# EAGLE board power (EAGLE 6.5.0)
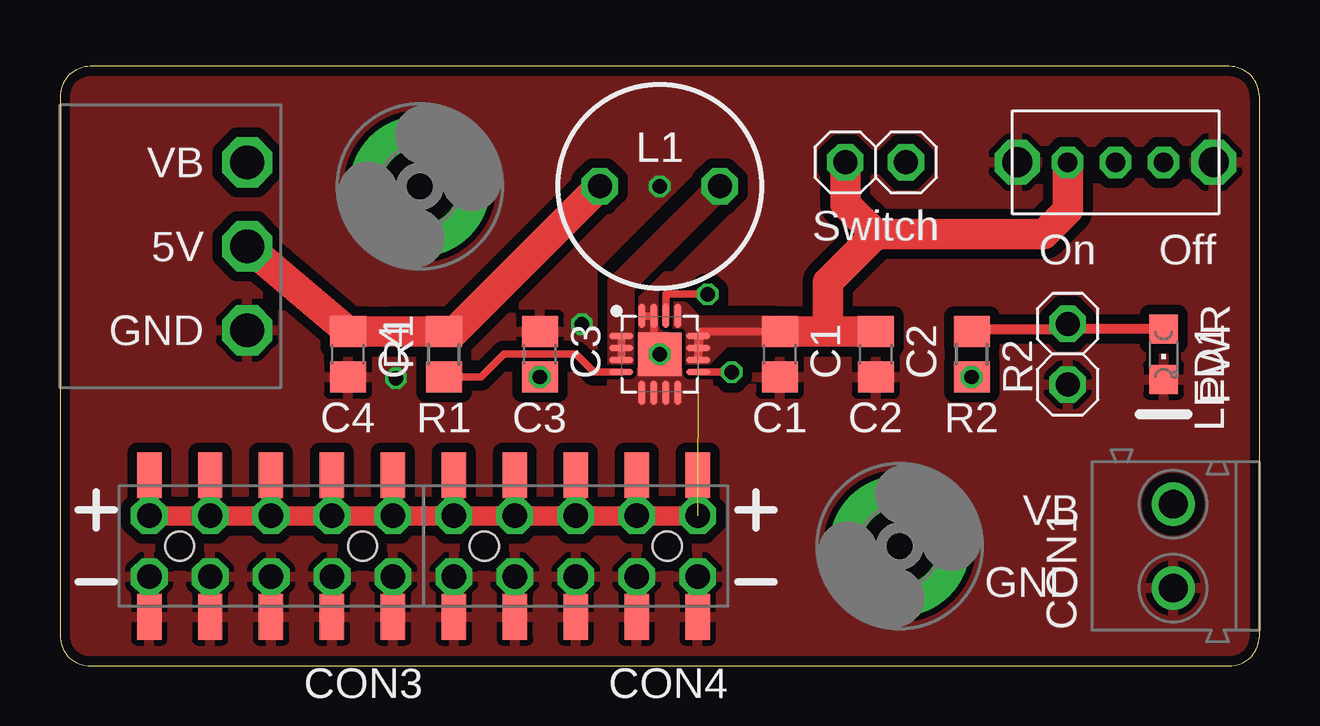
[diagram p0: board, top side]
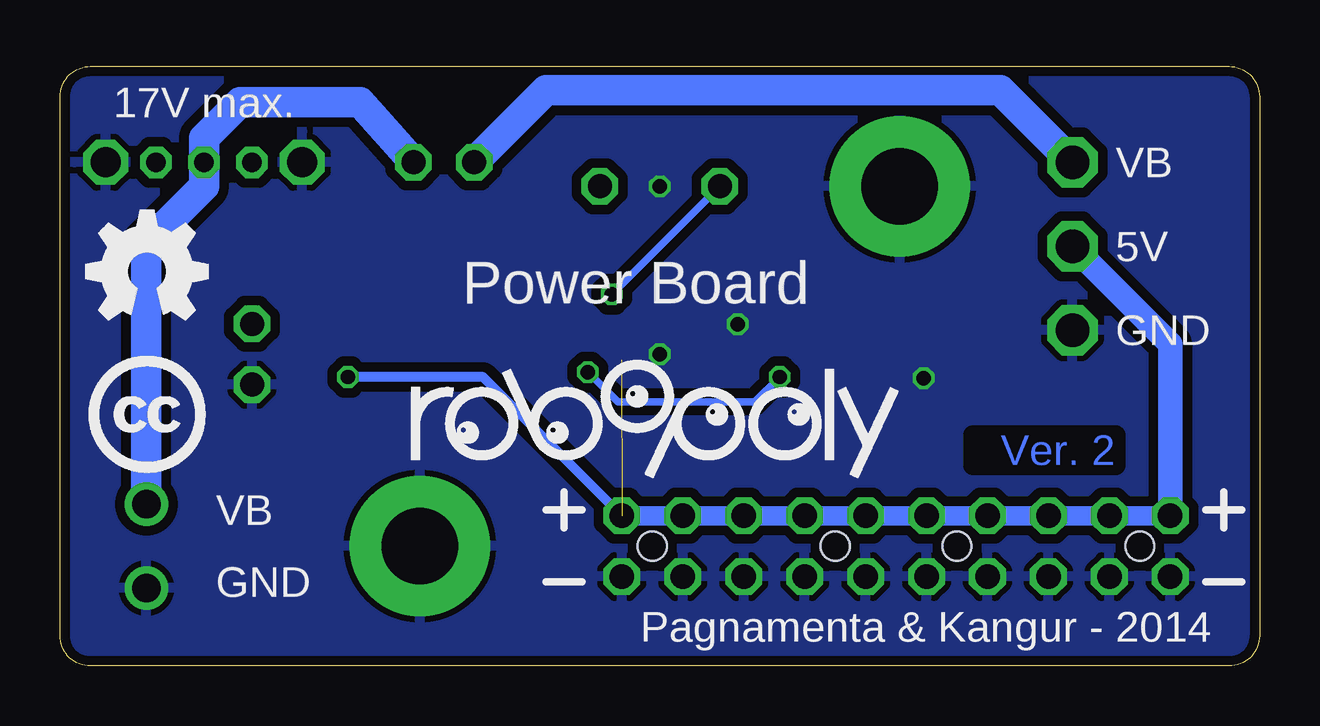
[diagram p1: board, bottom side, seen from below]

Size 50 x 25 mm. Coordinates in mm from the lower left corner, seen from the top.
Outline: 0,23.73 0,1.27 arc90 1.27,0 48.73,0 arc90 50,1.27 50,23.73 arc90 48.73,25 1.27,25 arc90 0,23.73
Copper layers (1*16): Top 0.035mm / dielectric 1.5mm / Bottom 0.035mm
Design rules "SeeedStudio_rule_no_angle_090911": minimum track width 6mil, minimum drill 12mil, track to track 6mil, track to pad 6mil, pad to pad 6mil, via to via 6mil, smd to smd 0mil, copper to edge 10mil, drill to drill 10mil, minimum pad ring 10mil, minimum via ring 6mil, stop-mask expansion 2mil, vias tented up to drill 100mil, thermal gap 10mil

## Footprints (pad centres in the part's own frame; a part is rotated, then mirrored left to right if it is on the bottom)
C0805 = smd 1.3 x 1.5: 1 -0.95,0; 2 0.95,0
4UCON-19963 = drill 1.2: 1 -1.75,3.6; 2 1.75,3.6
4UCON-19836 = drill 1.4 octagon: 1 -3.5,7.8; 2 0,7.8; 3 3.5,7.8
4UCON-10709 = smd 1.02 x 1.9: 1 -5.08,-2.95; 2 -2.54,-2.95; 3 0,-2.95; 4 2.54,-2.95; 5 5.08,-2.95; 6 5.08,2.95; 7 2.54,2.95; 8 0,2.95; 9 -2.54,2.95; 10 -5.08,2.95 | drill 1.02 octagon: 11 -5.08,-1.27; 12 -2.54,-1.27; 13 0,-1.27; 14 2.54,-1.27; 15 5.08,-1.27; 16 5.08,1.27; 17 2.54,1.27; 18 0,1.27; 19 -2.54,1.27; 20 -5.08,1.27 | hole 1.2: -3.81,0; 3.81,0
3,2-PAD = drill 3.2 pad 5.842: B3,2 0,0
QFN16 = smd 1 x 0.28: 1 -1.6,0.75; 2 -1.6,0.25; 3 -1.6,-0.25; 4 -1.6,-0.75; 9 1.6,-0.75; 10 1.6,-0.25; 11 1.6,0.25; 12 1.6,0.75 | smd 0.28 x 1: 5 -0.75,-1.6; 6 -0.25,-1.6; 7 0.25,-1.6; 8 0.75,-1.6; 13 0.75,1.6; 14 0.25,1.6; 15 -0.25,1.6; 16 -0.75,1.6 | smd 1.8 x 1.8: PAD 0,0
EXT = drill 1 octagon: 1 -1.27,0; 2 1.27,0
09D = drill 1 octagon: 1 -2.5,0; 2 2.5,0
CHIPLED_0805 = smd 1.2 x 1.2: A 0,-1.05; C 0,1.05
R0805 = smd 1.3 x 1.5: 1 -0.95,0; 2 0.95,0
SWITCH = drill 0.8 octagon: 1 -2,0; 2 0,0; 3 2,0 | drill 1.25 octagon: 4 -4.1,0; 5 4.1,0

## Placement (x,y rotation side)
C1  10uF  [C0805]  30,13 270 top
C2  100nF  [C0805]  34,13 270 top
C3  3.3nF  [C0805]  20,13 270 top
C4  22uF  [C0805]  12,13 270 top
CON1  4UCON-19963  [4UCON-19963]  50,5 90 top
CON2  4UCON-19836  [4UCON-19836]  0,17.5 270 top
CON3  4UCON-10709  [4UCON-10709]  8.8,5 180 top
CON4  4UCON-10709  [4UCON-10709]  21.5,5 180 top
H1  MOUNT-PAD-ROUND3.2  [3,2-PAD]  35,5 0 top
H2  MOUNT-PAD-ROUND3.2  [3,2-PAD]  15,20 0 top
IC1  TPS62133  [QFN16]  25,13 0 top
JP1  EXT  [EXT]  34,21 180 top
JP2  EXT  [EXT]  42,13 270 top
L1  2.2uH  [09D]  25,20 180 top
LED1  [CHIPLED_0805]  46,13 180 top
LICENCE1  LICENCECC-BOTTOM  [CREATIVE-COMMONS]  46.4,10.5 0 top
R1  100K  [R0805]  16,13 90 top
R2  1K  [R0805]  38,13 270 top
SW1  SWITCHSWITCH  [SWITCH]  44,21 0 top
U$9  ROBOPOLY-LOGOBOTTOM-BIG  [ROBOPOLY-LOGO-BOTTOM-BIG]  25,10 0 top
U$10  OPEN-HARDWARE-LOGOBOTTOM-SMALL  [OPEN-HARDWARE-BOTTOM-SMALL]  46.4,16.5 0 top

## Library data of the parts
C1-C4 R1 R2 = rcl
CON1-CON4 H1 H2 IC1 JP1 JP2 L1 LICENCE1 SW1 U$9 U$10 = robopoly
LED1 = led

## Nets
5V/3A: C4.1 CON2.2 CON3.1 CON3.2 CON3.3 CON3.4 CON3.5 CON3.11 CON3.12 CON3.13 CON3.14 CON3.15 CON4.1 CON4.2 CON4.3 CON4.4 CON4.5 CON4.11 CON4.12 CON4.13 CON4.14 CON4.15 IC1.14 L1.2 R1.2 R2.2
GND: C1.2 C2.2 C3.1 C4.2 CON1.1 CON2.3 CON3.6 CON3.7 CON3.8 CON3.9 CON3.10 CON3.16 CON3.17 CON3.18 CON3.19 CON3.20 CON4.6 CON4.7 CON4.8 CON4.9 CON4.10 CON4.16 CON4.17 CON4.18 CON4.19 CON4.20 H1.B3,2 H2.B3,2 IC1.5 IC1.6 IC1.7 IC1.8 IC1.15 IC1.16 IC1.PAD JP2.2 LED1.C SW1.4 SW1.5
LEDIN: JP2.1 LED1.A R2.1
N$1: SW1.3
N$6: CON1.2 JP1.1 SW1.2
PG: IC1.4 R1.1
SS/TR: C3.2 IC1.9
SW: IC1.1 IC1.2 IC1.3 L1.1
VCC: C1.1 C2.1 CON2.1 IC1.10 IC1.11 IC1.12 IC1.13 JP1.2 SW1.1

## Tracks (layer width: path | path; a pad name or v marks a point on that pad's centre or on a via)
5V/3A  (via drill 0.6)
  Top 0.305: IC1.14 25.25,15.5 v27,15.5
  Top 0.813: CON3.5 CON3.15 CON3.14 | CON3.4 CON3.14 | CON3.14 CON3.13 | CON3.3 CON3.13 | CON3.13 CON3.12 | CON3.2 CON3.12 | CON3.12 CON3.11 | CON3.1 CON3.11 | CON3.11 CON4.15 | CON4.5 CON4.15 | CON4.15 CON4.14 | CON4.4 CON4.14 | CON4.14 CON4.13 | CON4.3 CON4.13 | CON4.13 CON4.12 | CON4.2 CON4.12 | CON4.1 CON4.11 CON4.12
  Top 1.016: 16.45,13.95 15,13.95
  Top 1.27: R1.2 16.45,13.95 L1.2 | R1.2 15,13.95 C4.1 CON2.2 | R1.2 13.88,13.95
  Bottom 0.305: v27,15.5 L1.2
  Bottom 0.406: CON4.11 32.36,12.05 R2.2
  Bottom 1.016: CON2.2 3.72,13.42 CON3.15
  other vias: 38,12.05
GND  (via drill 0.6)
  Top 0.305: IC1.16 IC1.15 24.75,13.25 IC1.PAD
  other vias: 25,13 25,20 21.75,14.25 14,12
  pour Top (isolate 0.406, rank 6): 1.27,25 48.73,25 arc-90 50,23.73 50,1.27 arc-90 48.73,0 1.27,0 arc-90 0,1.27 0,23.73 arc-90
  pour Bottom (isolate 0.406, rank 6): 1.27,25 48.73,25 arc-90 50,23.73 50,1.27 arc-90 48.73,0 1.27,0 arc-90 0,1.27 0,23.73 arc-90
  pour Top (rank 2, no thermals): 25.25,16.25 26,16.25 26,12 27,12 27,10 23,10 23,14
LEDIN
  Top 0.406: R2.1 38.1,14.05 41.78,14.05 JP2.1 42.22,14.05 LED1.A
N$6
  Bottom 1.27: JP1.1 37.5,23.5 42.5,23.5 44,22 SW1.2 44,20 46.4,17.6 CON1.2
PG
  Top 0.305: R1.1 17.55,12.05 18.5,13 21.5,13 22.25,12.25 IC1.4
SS/TR  (via drill 0.6)
  Top 0.305: IC1.9 v28,12.25
  Bottom 0.305: C3.2 21.05,11 26.75,11 v28,12.25
  other vias: 20,12.05
SW
  Top 0.305: IC1.1 IC1.2 IC1.3
  pour Top (no thermals): 23.75,12.5 23.75,15.75 28,20 27.5,20.5 23,16 23,12.5
VCC  (1 unrouted)
  Top 0.305: IC1.12 IC1.11 IC1.10 26.7,13.95 C1.1
  Top 1.27: C1.1 32,13.95 | 32,13.95 C2.1 | SW1.1 42,19 41,18 34,18 | 34,18 32.73,19.27 JP1.2 | 32,13.95 32,16 34,18
  Bottom 0.813: 3.72,6.27 26.58,6.27
  Bottom 1.27: JP1.2 29.73,24 10.8,24 CON2.1
  pour Top (no thermals): 25.5,15 25.5,14 26,14 26,12.5 26.75,12.5 27.75,13.5 29.5,13.5 29.5,14.4 26.6,14.4 26,15

## Text on the board
Bottom: Ver. 2
tPlace: VB | L1 | Switch | 5V | On | Off | GND | PWR | C4 | R1 | C3 | C1 | C2 | R2 | VB | GND
bPlace: 17V max. | VB | 5V | Power Board | GND | VB | GND | Pagnamenta & Kangur - 2014
Document: Power Board | Version: 2 | http://robopoly.epfl.ch | 2014-07-25 | Licence: Creative Commons